# Altium PCB Placement_Douglas_RAM_NOR_dirty_test.PcbDoc
Units mm, origin at the board's own origin, x right, y up, seen from the top; angles counter-clockwise.
Board outline 70 x 43 mm, 4 copper layers (Top Layer, GND, Signal Layer 1, Bottom Layer), stack 1.534 mm thick; 103 components, 152 nets, 535 pads, 36 vias.
Unrouted connection lines stored in the file: 354.
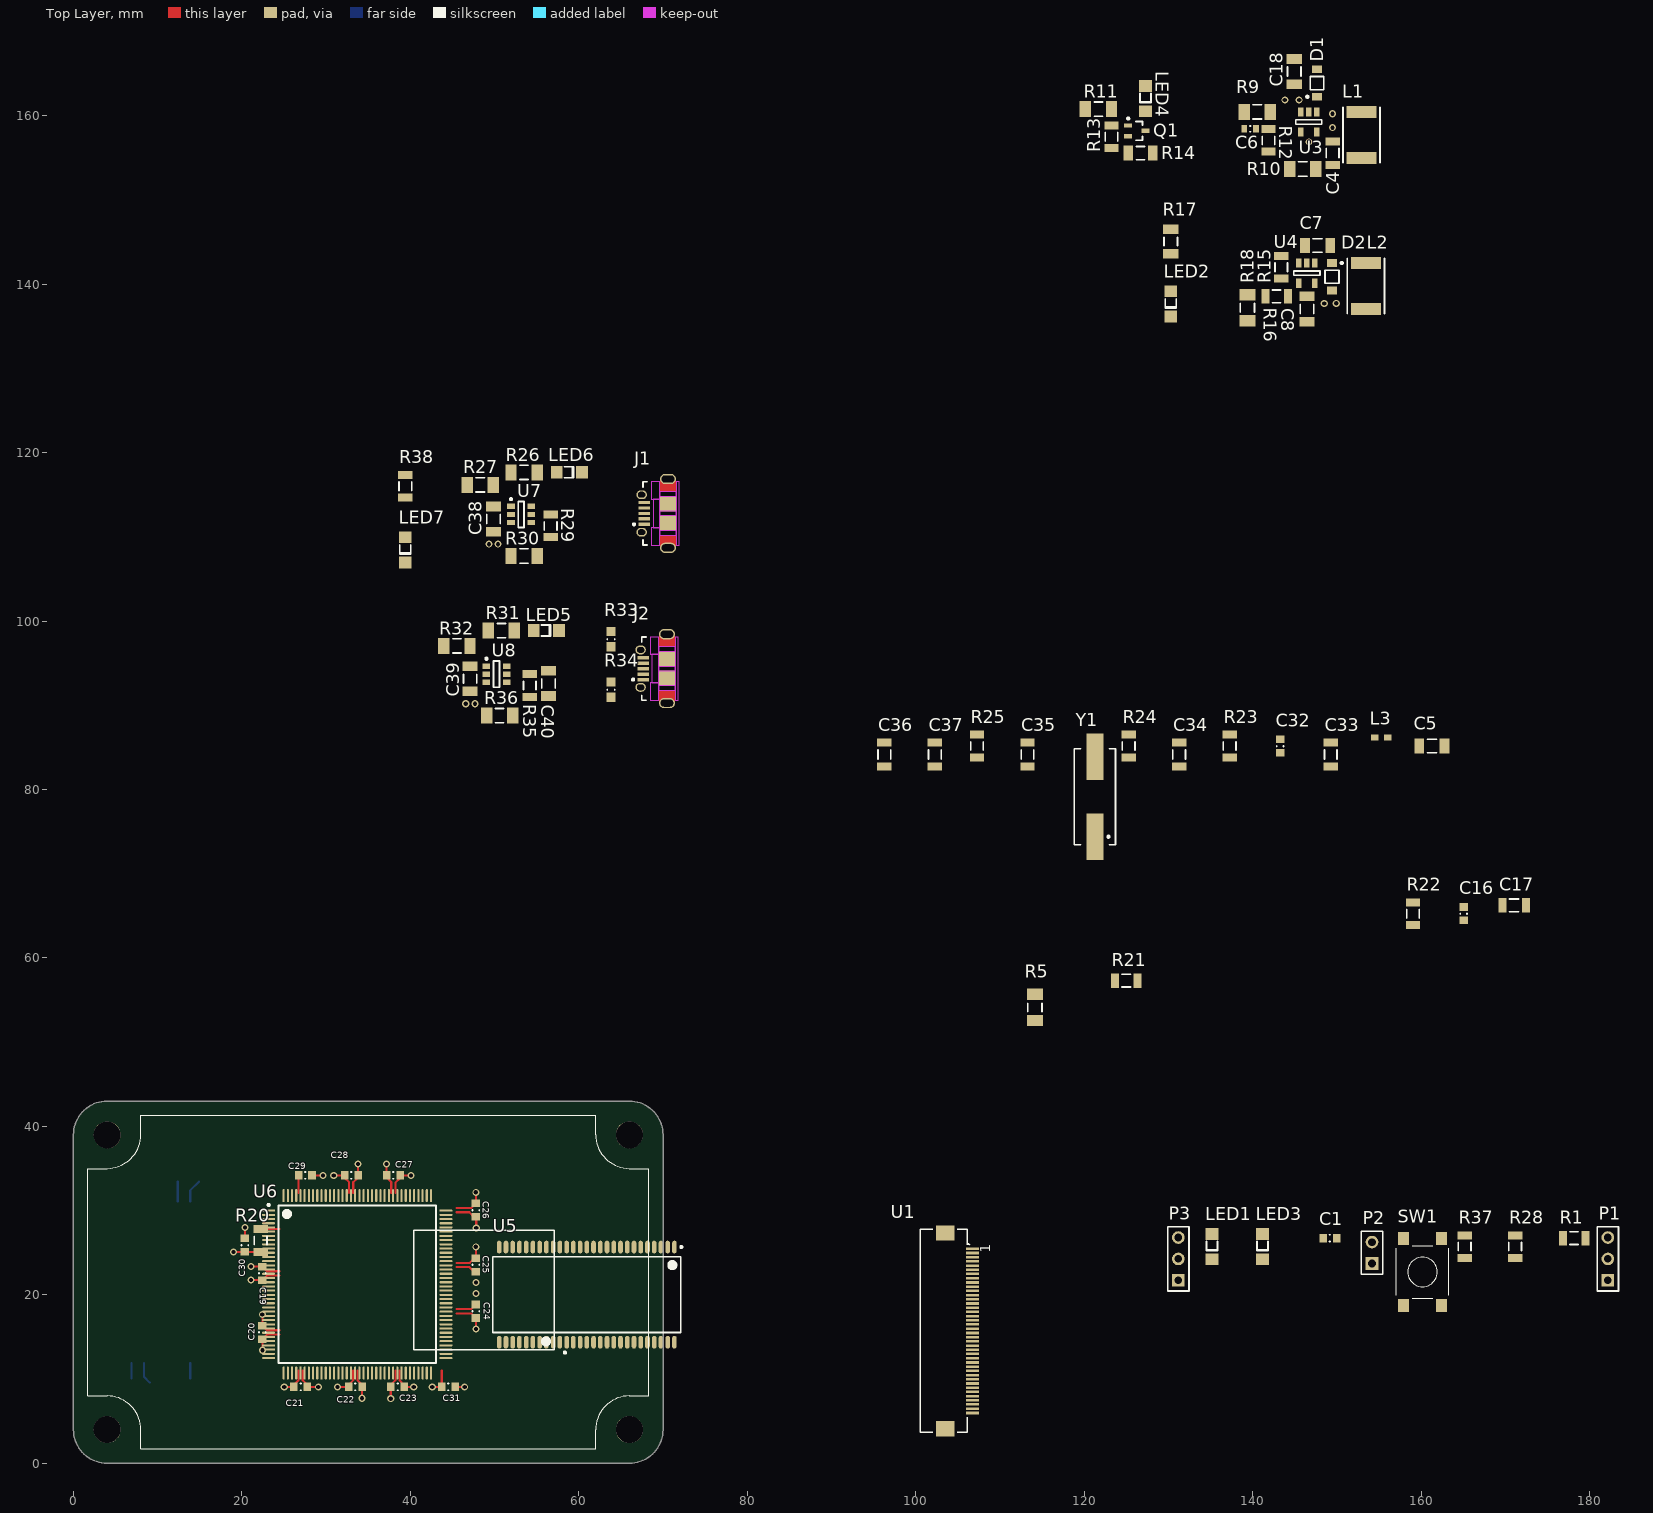
[diagram p0: Top Layer view]
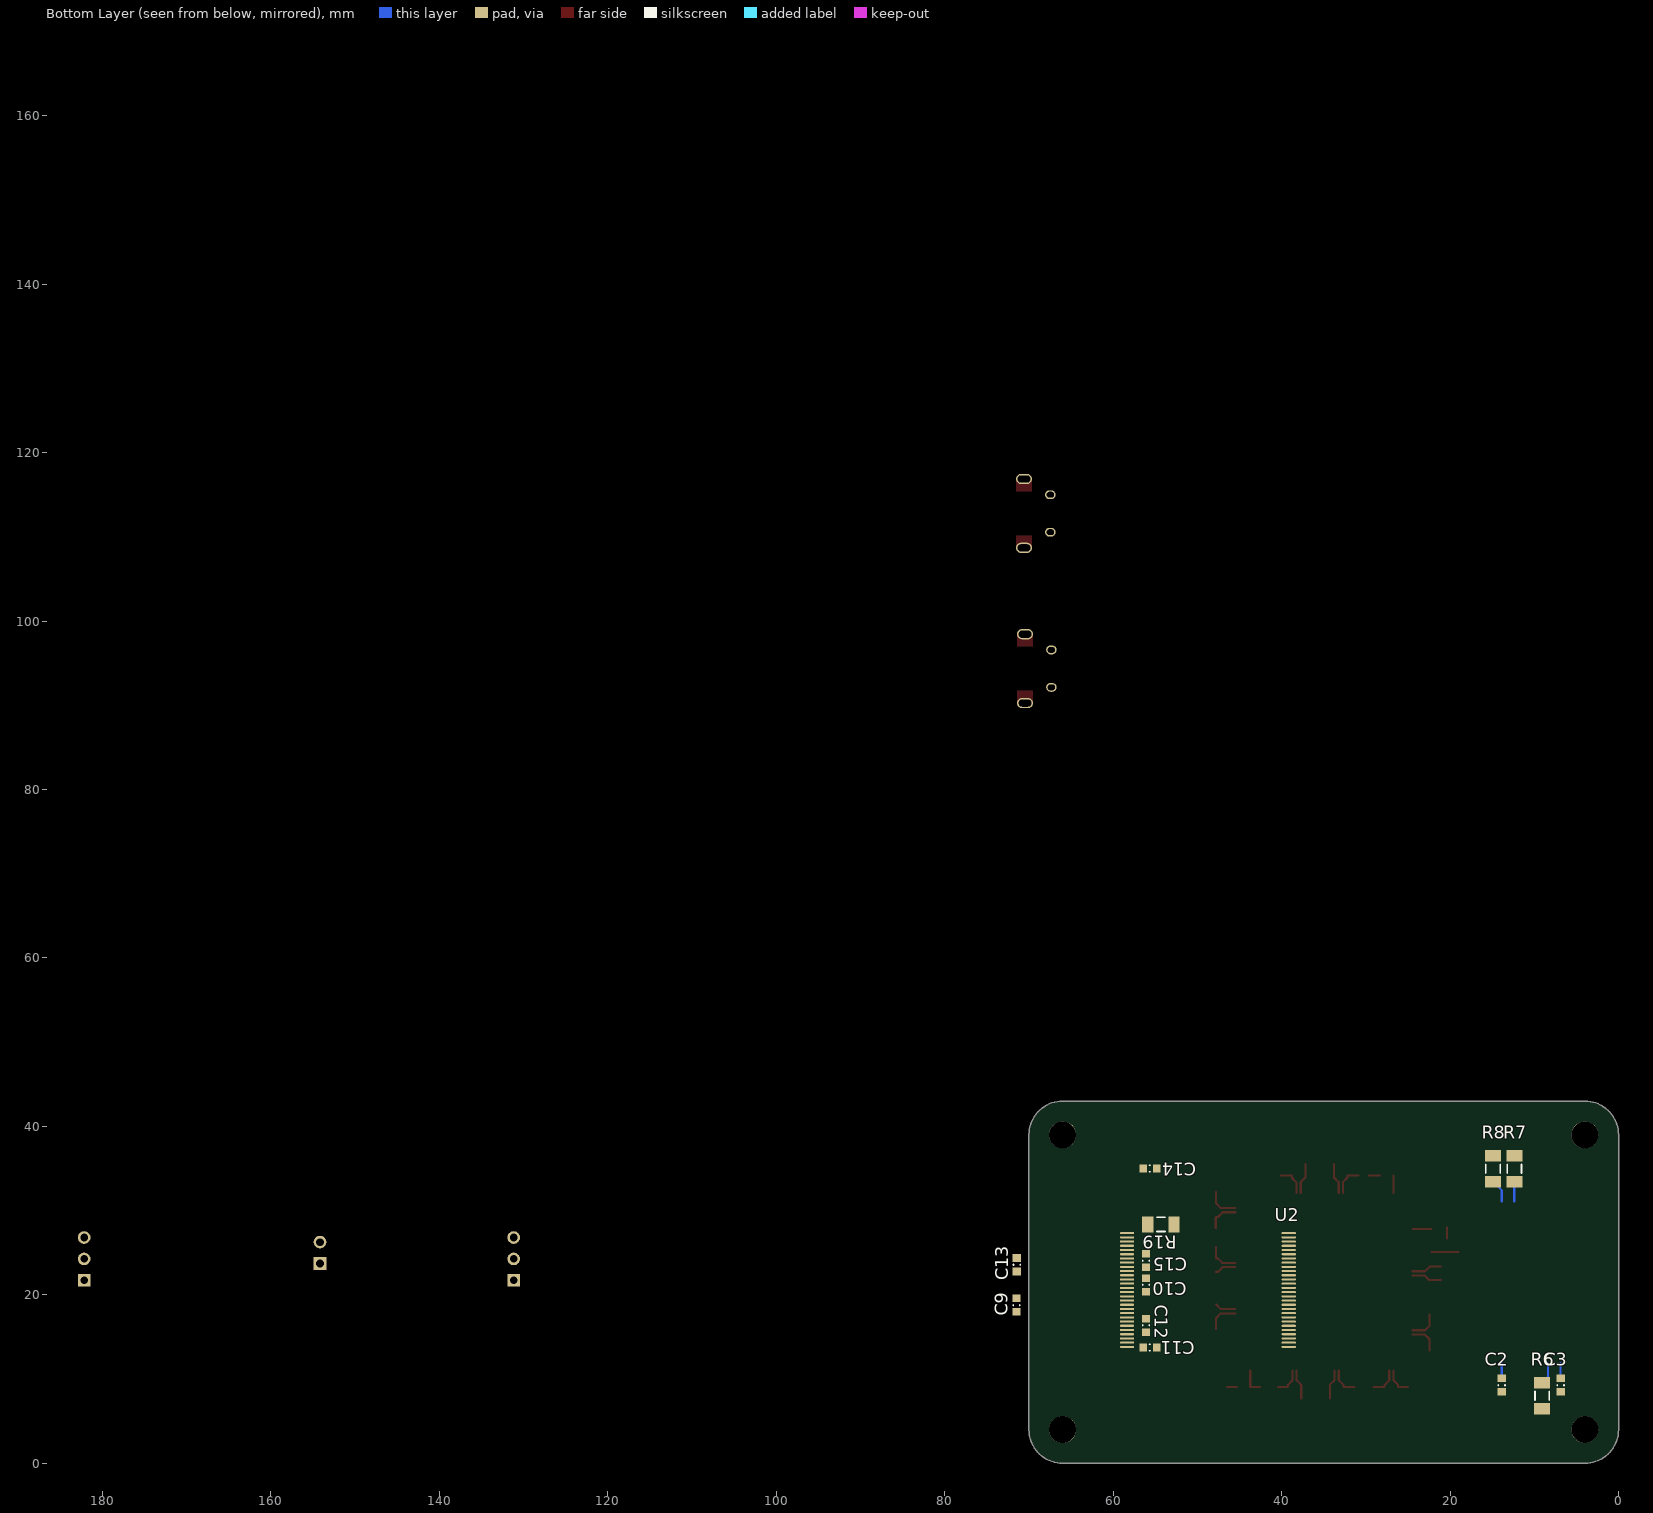
[diagram p1: Bottom Layer view, seen from below]
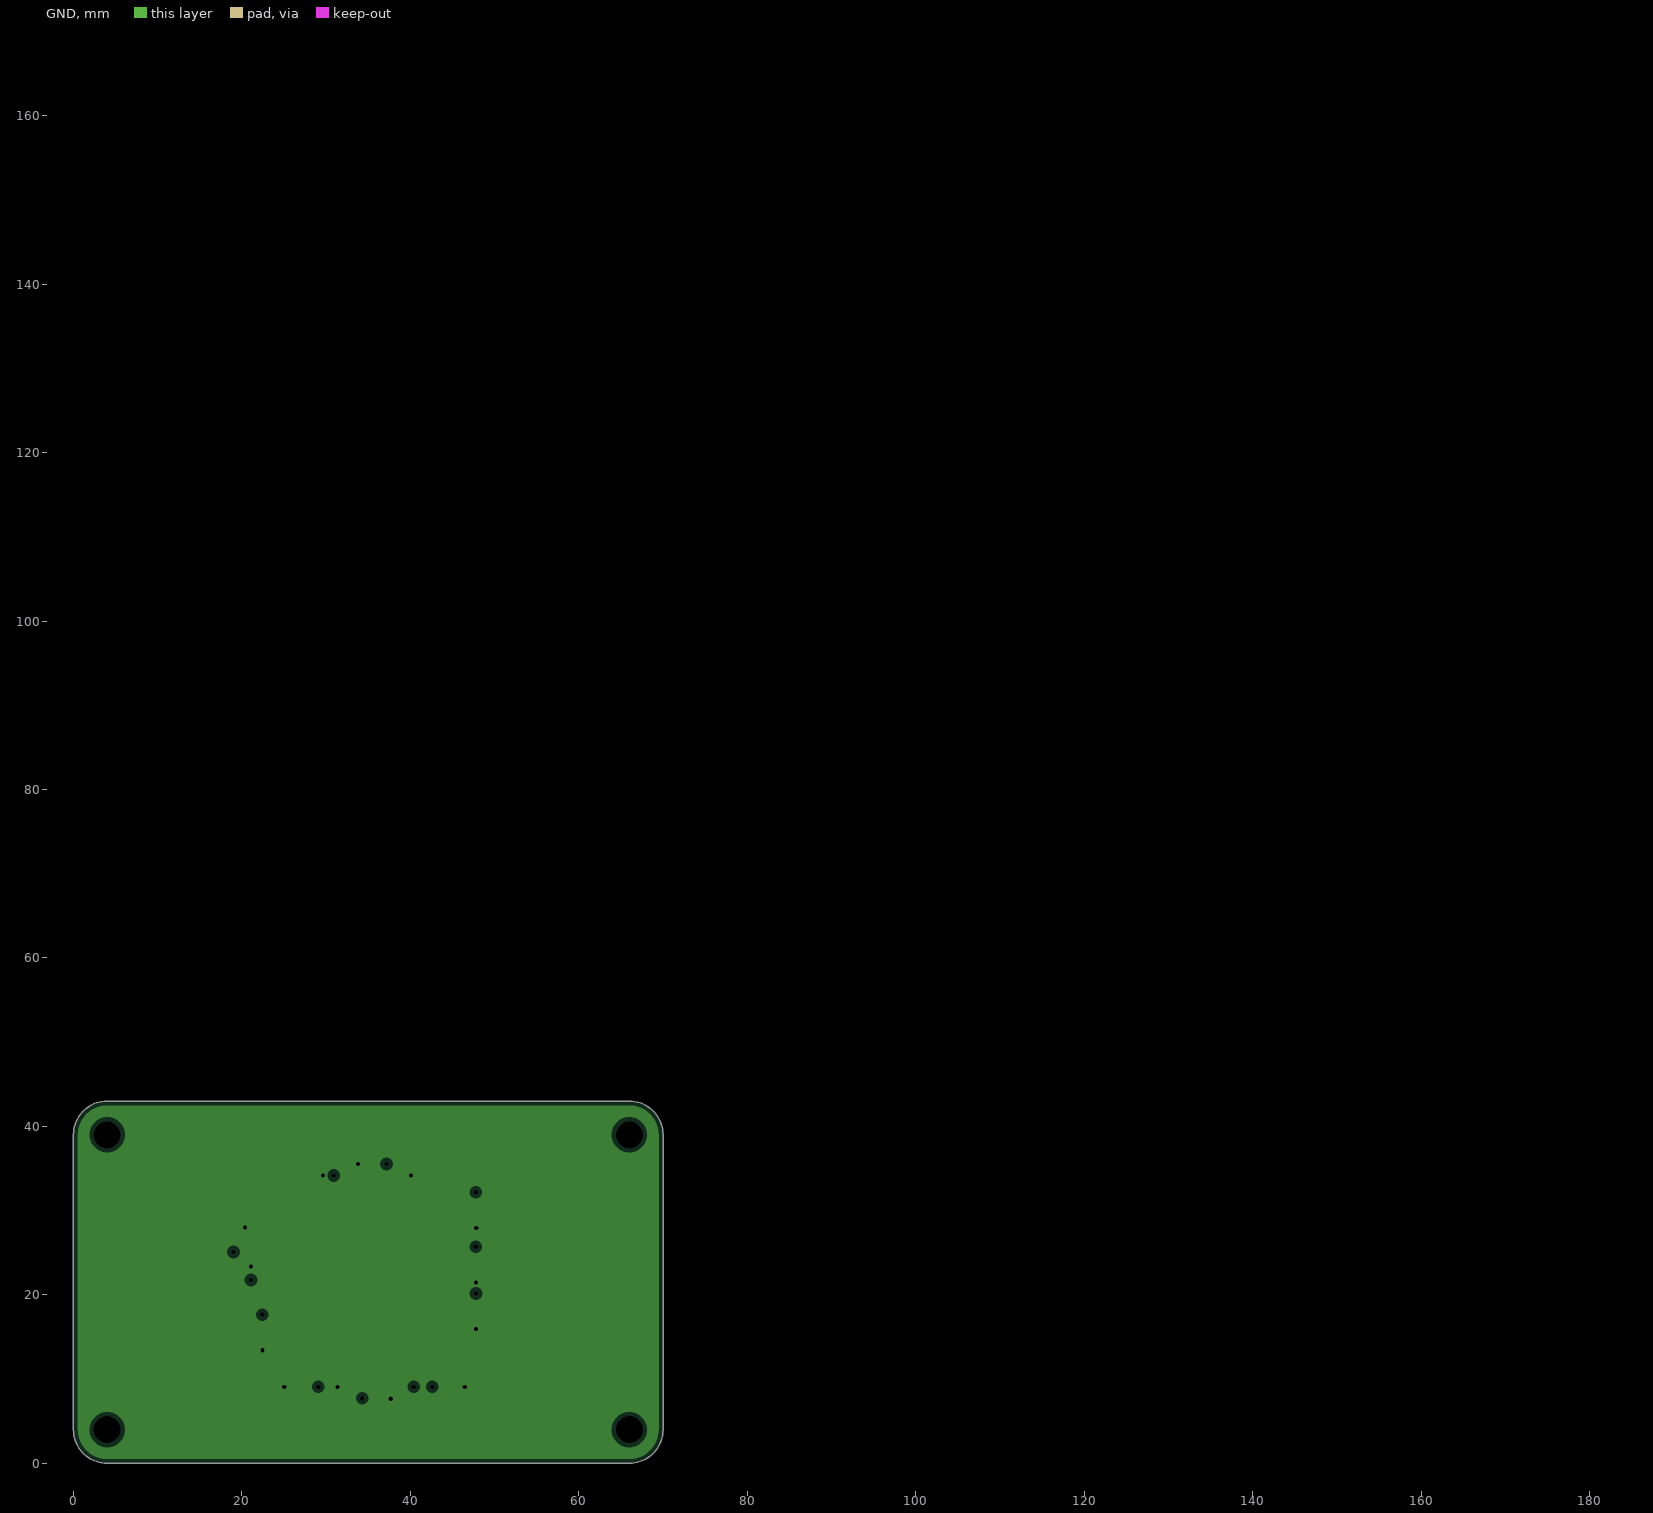
[diagram p2: GND, clearances drawn from the general rule]

## Layer stack, top to bottom
Top Solder: solder mask 0.0102, Solder Resist, Dk 3.5
Top Layer: signal copper 0.017
Dielectric1: prepreg 0.36, Dk 4.2
GND: plane copper 0.035, net GND
Dielectric 2: core 0.71, FR4, Dk 4.2
Signal Layer 1: signal copper 0.035
Dielectric 3: prepreg 0.36, Dk 4.2
Bottom Layer: signal copper 0.017
Bottom Solder: solder mask 0.0102, Solder Resist, Dk 3.5

## Board outline
4,0 cw(c4,4) 0,4 0,39 cw(c4,39) 4,43 66,43 cw(c66,39) 70,39 70,4 cw(c66,4) 66,0

## Design rules (kind name [scope] priority, off if disabled: settings)
Clearance [All] p1: gap=0.21
DiffPairsRouting [All] p1: maxlimit=0.254 minlimit=0.254 mostfreqgap=0.254 toplayer_minwidth=0.381 toplayer_maxwidth=0.381 toplayer_prefwidth=0.381 midlayer1_minwidth=0.381 midlayer1_maxwidth=0.381 midlayer1_prefwidth=0.381 bottomlayer_minwidth=0.381 bottomlayer_maxwidth=0.381 bottomlayer_prefwidth=0.381 maxuncoupledlength=12.7
MinimumSolderMaskSliver [All] p1: minsoldermaskwidth=0.21
PlaneClearance [All] p1: clearance=0.508
PlaneConnect [All] p1: planeconnectstyle=Relief reliefexpansion=0.508 reliefentries=4 reliefconductorwidth=0.254 reliefairgap=0.254
PolygonConnect [All] p1: connectstyle=Relief reliefconductorwidth=0.254 reliefentries=4 polygonreliefangle="90 Angle" airgapwidth=0.254
RoomDefinition USB [InComponentClass('USB')] p1: confinementstyle=ConfineIn formatcopy=TRUE lockcomponents=FALSE outline 35.775,83.6 75.425,83.6 75.425,122.175 35.775,122.175
RoomDefinition Power [InComponentClass('Power')] p2: confinementstyle=ConfineIn formatcopy=TRUE lockcomponents=FALSE outline 115.15,130.925 156.7,130.925 156.7,169.875 115.15,169.875
RoomDefinition IO_Peripherals [InComponentClass('IO_Peripherals')] p3: confinementstyle=ConfineIn formatcopy=TRUE lockcomponents=FALSE outline 96.175,2.725 184.175,2.725 184.175,31.725 96.175,31.725
RoutingVias [All] p1: holewidth=0.5 width=0.84 viastyle="Through Hole" minholewidth=0.4 minwidth=0.74 maxholewidth=0.5 maxwidth=0.84
SolderMaskExpansion [All] p1: expansion=0.102
Width [All] p1: maxlimit=0.254 minlimit=0.21 preferedwidth=0.254
25 further rules are at their usual default settings.

## Classes and differential pairs
net class PG[0..15]: PG6 PG8 PG9 PG13 PG14 PG15
net class PF[0..15]: PF6 PF7 PF8 PF9 PF10 PF11
net class PE[0..15]: PE0 PE1
net class PD[0..15]: PD2 PD4 PD5 PD7
net class PC[0..15]: PC0 PC1 PC2 PC3 PC4 PC5 PC6 PC8 PC9 PC10 PC11 PC12 PC13 PC14 PC15
net class PB[0..15]: PB0 PB1 PB2 PB3 PB4 PB5 PB6 PB7 PB12 PB13 PB14 PB15
net class PA[0..15]: PA0 PA1 PA2 PA4 PA5 PA7 PA8 PA9 PA10 PA11 PA12 PA13 PA14 PA15
net class G[7..2]: G2 G3 G4 G5 G6 G7
net class DQ[0..15]: DQ0 DQ1 DQ2 DQ3 DQ4 DQ5 DQ6 DQ7 DQ8 DQ9 DQ10 DQ11 DQ12 DQ13 DQ14 DQ15
net class B[7..2]: B2 B3 B4 B5 B6 B7
net class A[0..23]: A0 A1 A2 A3 A4 A5 A6 A7 A8 A9 A10 A11 A12 A13 A14 A15 A16 A17 A18 A19 A20 A21 A22 A23
component class USB: C38 C39 C40 J1 J2 LED5 LED6 LED7 R26 R27 R29 R30 R31 R32 R33 R34 R35 R36 R38 U7 U8
component class RAM: C9 C10 C11 C12 C13 C14 C15 R19 U5
component class Power: C4 C6 C7 C8 C18 D1 D2 L1 L2 LED2 LED4 Q1 R9 R10 R11 R12 R13 R14 R15 R16 R17 R18 U3 U4
component class NOR: C2 C3 R6 R7 R8 U2
component class MCU: C5 C16 C17 C19 C20 C21 C22 C23 C24 C25 C26 C27 C28 C29 C30 C31 C32 C33 C34 C35 C36 C37 L3 R5 R20 R21 R22 R23 R24 R25 U6 Y1
component class IO_Peripherals: C1 LED1 LED3 P1 P2 P3 R1 R28 R37 SW1 U1
differential pair OTG: +OTG_P -OTG_N

## Components (designator, comment, footprint, x,y, rotation, side; value= is the part's Value field where it differs from the comment)
C1 "100nF" CAPC0603(1608)100_N 149.175,26.725 r0 top
C2 "100nF" CAPC0603(1608)100_N 13.875,9.275 r90 bottom
C3 "100nF" CAPC0603(1608)100_N 6.875,9.275 r90 bottom
C4 "2.2uF 16V" CAPC1206(3216)190_L 149.5,155.55 r270 top
C5 "4.7uF" CAPC1206(3216)190_N 161.275,85.15 r0 top
C6 "CAP 100pF 50V 0603(1608)" CAPC0603(1608)100_L 139.7,158.425 r180 top
C7 "CAP 22uF 16V 1206(3216)" CAPC1206(3216)190_N 147.725,144.6 r0 top
C8 "CAP 22uF 16V 1206(3216)" CAPC1206(3216)190_N 146.45,137.05 r270 top
C9 "100nF" CAPC0603(1608)100_N 71.475,18.775 r270 bottom
C10 "100nF" CAPC0603(1608)100_N 56.1,21.175 r270 bottom
C11 "100nF" CAPC0603(1608)100_N 55.65,13.75 r0 bottom
C12 "100nF" CAPC0603(1608)100_N 56.1,16.375 r270 bottom
C13 "100nF" CAPC0603(1608)100_N 71.425,23.575 r270 bottom
C14 "100nF" CAPC0603(1608)100_N 55.65,35 r0 bottom
C15 "100nF" CAPC0603(1608)100_N 56.1,24.075 r90 bottom
C16 "100nF" CAPC0603(1608)100_N 165.05,65.25 r90 top
C17 "1uF" CAPC1206(3216)170_L 171.05,66.25 r0 top
C18 "4.7uF" CAPC1206(3216)190_N 144.95,165.225 r90 top
C19 "100nF" CAPC0603(1608)100_N 22.425,22.55 r270 top
C20 "100nF" CAPC0603(1608)100_N 22.425,15.55 r90 top
C21 "100nF" CAPC0603(1608)100_N 26.975,9.075 r0 top
C22 "100nF" CAPC0603(1608)100_N 33.475,9.075 r0 top
C23 "100nF" CAPC0603(1608)100_N 38.475,9.075 r0 top
C24 "100nF" CAPC0603(1608)100_N 47.775,18.05 r90 top
C25 "100nF" CAPC0603(1608)100_N 47.775,23.55 r90 top
C26 "100nF" CAPC0603(1608)100_N 47.775,30.05 r90 top
C27 "100nF" CAPC0603(1608)100_N 37.975,34.175 r180 top
C28 "100nF" CAPC0603(1608)100_N 33,34.175 r180 top
C29 "100nF" CAPC0603(1608)100_N 27.525,34.175 r180 top
C30 "100nF" CAPC0603(1608)100_N 20.35,25.9 r270 top
C31 "100nF" CAPC0603(1608)100_N 44.525,9.075 r180 top
C32 "100nF" CAPC0603(1608)100_N 143.275,85.15 r90 top
C33 "1uF" CAPC1206(3216)170_L 149.275,84.15 r90 top
C34 "CAP 18pF 630V" CAPC1206(3216)170_L 131.275,84.15 r90 top
C35 "CAP 18pF 630V" CAPC1206(3216)170_L 113.275,84.15 r90 top
C36 "2.2uF 16V" CAPC1206(3216)190_L 96.275,84.15 r90 top
C37 "2.2uF 16V" CAPC1206(3216)190_L 102.275,84.15 r90 top
C38 "4.7uF" CAPC1206(3216)190_N 49.875,112.1 r90 top
C39 "4.7uF" CAPC1206(3216)190_N 47.1,93.15 r90 top
C40 "4.7uF" CAPC1206(3216)190_N 56.4,92.6 r90 top
D1 "MBR0530T1G" ONSC-SOD-123-2-425-04_V 147.65,163.875 r90 top
D2 "MBR230LSFT1G" ONSC-SOD-123FL-2-498-01_V 149.425,140.875 r270 top
J1 "ZX62D-AB-5P8" HIRO-ZX62D-AB-5P8_V 69.025,112.775 r90 top
J2 "ZX62D-AB-5P8" HIRO-ZX62D-AB-5P8_V 68.9,94.35 r90 top
L1 "22.0 µH" WE-PD4-S 152.925,157.7 r90 top
L2 "2.20 µH" WE-PD4-S 153.45,139.775 r270 top
L3 "Ferrite" SMD-0603 155.275,86.15 r0 top
LED1 "150120YS75000" 1206_A 135.175,25.725 r90 top
LED2 "150120GS75000" 1206_A 130.275,137.65 r90 top
LED3 "150120RS75000" 1206_A 141.175,25.725 r90 top
LED4 "150120BS75000" 1206_A 127.275,162.025 r90 top
LED5 "150120RS75000" 1206_A 56.15,98.875 r180 top
LED6 "150120RS75000" 1206_A 58.875,117.675 r180 top
LED7 "150120YS75000" 1206_A 39.4,108.45 r90 top
P1 "Header 3" HDR1X3 182.175,21.725 r90 top
P2 "Header 2" HDR1X2 154.175,23.725 r90 top
P3 "Header 3" HDR1X3 131.175,21.725 r90 top
Q1 "BC847BW" INF-SOT323_N 126.25,158.2 r0 top
R1 "100K 1% 1206(3216)" RESC1206(3216)_L 178.175,26.725 r0 top
R5 "10K 5% 1206" RESC1206(3216)_M 114.15,54.125 r90 top
R6 "10K 5% 1206" RESC1206(3216)_M 9.075,8.025 r270 bottom
R7 "10K 5% 1206" RESC1206(3216)_M 12.375,34.975 r90 bottom
R8 "10K 5% 1206" RESC1206(3216)_M 14.9,34.975 r90 bottom
R9 "215K 1% 1206(3216)" RESC1206(3216)_M 140.55,160.45 r180 top
R10 "10K 5% 1206" RESC1206(3216)_M 145.95,153.675 r0 top
R11 "10K 5% 1206" RESC1206(3216)_M 121.7,160.775 r180 top
R12 "13K3 1% 1206(3216)" RESC1206(3216)_L 141.875,157.075 r90 top
R13 "3K32 1%" RESC1206(3216)_L 123.25,157.5 r90 top
R14 "86R6 1%" RESC1206(3216)_N 126.675,155.55 r180 top
R15 "45K3 1% 1206(3216)" RESC1206(3216)_L 143.4,142 r270 top
R16 "100K 1% 1206(3216)" RESC1206(3216)_L 142.85,138.55 r0 top
R17 "5R1 1% 1206(3216)" RESC1206(3216)_N 130.275,145.05 r90 top
R18 "10K 5% 1206" RESC1206(3216)_M 139.375,137.2 r270 top
R19 "10K 5% 1206" RESC1206(3216)_M 54.325,28.375 r180 bottom
R20 "Jumper 1206(3216)" RESC1206(3216)_L 22.225,26.45 r90 top
R21 "Jumper 1206(3216)" RESC1206(3216)_L 125,57.3 r0 top
R22 "Jumper 1206(3216)" RESC1206(3216)_L 159.05,65.25 r90 top
R23 "Jumper 1206(3216)" RESC1206(3216)_L 137.275,85.15 r90 top
R24 "402R 1% 1206(3216)" RESC1206(3216)_L 125.275,85.15 r90 top
R25 "Jumper 1206(3216)" RESC1206(3216)_L 107.275,85.15 r90 top
R26 "330R 5% 1206(3216)" RESC1206(3216)_M 53.5,117.65 r180 top
R27 "10K 5% 1206" RESC1206(3216)_M 48.3,116.175 r180 top
R28 "130R 5% 1206(3216)" RESC1206(3216)_L 171.175,25.725 r90 top
R29 "18K7 1%" RESC1206(3216)_L 56.65,111.3 r90 top
R30 "10K 5% 1206" RESC1206(3216)_M 53.5,107.725 r180 top
R31 "330R 5% 1206(3216)" RESC1206(3216)_M 50.8,98.85 r180 top
R32 "10K 5% 1206" RESC1206(3216)_M 45.525,97.05 r180 top
R33 "22R 1%" RESC0603(1608)_M 63.825,97.85 r90 top
R34 "22R 1%" RESC0603(1608)_M 63.825,91.85 r90 top
R35 "18K7 1%" RESC1206(3216)_L 54.175,92.35 r90 top
R36 "10K 5% 1206" RESC1206(3216)_M 50.6,88.775 r180 top
R37 "130R 5% 1206(3216)" RESC1206(3216)_L 165.175,25.725 r90 top
R38 "130R 5% 1206(3216)" RESC1206(3216)_L 39.4,116 r90 top
SW1 "430182043816" 430182043816 160.175,22.725 r90 top
U1 "SOCKET FFC/FPC, ZIF, 0.5MM, 40WAY" HIROSE_FH12S-40S-0.5SH(55) 110.175,15.725 r90 top
U2 "S29GL256P" 56-Pin_Standard_TSOP 48.75,20.575 r0 bottom
U3 "LM27313XMF/NOPB" DBV0005A 146.675,159.25 r270 top
U4 "LMR10510XMFE/NOPB" DBV0005A 146.45,141.3 r270 top
U5 "MT48LC32M8A2P-7E" MICT-P-54_N 60.95,20.025 r270 top
U6 "STM32F429ZIT6" STM-LQFP144_L 33.7,21.25 r0 top
U7 "TPS2552DBVT" DBV6_L 53.15,112.65 r0 top
U8 "TPS2552DBVT" DBV6_L 50.225,93.7 r0 top
Y1 "HC49/4H_SMX" HC49/4H_SMX 121.275,79.15 r90 top

## Footprints (in the part's own frame and the unit in brackets; to place one, negate y for a bottom-side part, rotate by r counter-clockwise, add the part's x,y. Pads: shape width x height; smd on the part's side, far side on the other; paste and mask are expansions set on the pad)
56-Pin_Standard_TSOP [mm] "SOP, 56-Leads, Body 18.6x14.2mm, Pitch 0.5mm, IPC Medium Density"
  oval 1.7x0.25 smd: 1(9.6,6.75) 2(9.6,6.25) 3(9.6,5.75) 4(9.6,5.25) 5(9.6,4.75) 6(9.6,4.25) 7(9.6,3.75) 8(9.6,3.25) 9(9.6,2.75) 10(9.6,2.25) 11(9.6,1.75) 12(9.6,1.25) 13(9.6,0.75) 14(9.6,0.25) 15(9.6,-0.25) 16(9.6,-0.75) 17(9.6,-1.25) 18(9.6,-1.75) 19(9.6,-2.25) 20(9.6,-2.75) 21(9.6,-3.25) 22(9.6,-3.75) 23(9.6,-4.25) 24(9.6,-4.75) 25(9.6,-5.25) 26(9.6,-5.75) 27(9.6,-6.25) 28(9.6,-6.75) 29(-9.6,-6.75) 30(-9.6,-6.25) 31(-9.6,-5.75) 32(-9.6,-5.25) 33(-9.6,-4.75) 34(-9.6,-4.25) 35(-9.6,-3.75) 36(-9.6,-3.25) 37(-9.6,-2.75) 38(-9.6,-2.25) 39(-9.6,-1.75) 40(-9.6,-1.25) 41(-9.6,-0.75) 42(-9.6,-0.25) 43(-9.6,0.25) 44(-9.6,0.75) 45(-9.6,1.25) 46(-9.6,1.75) 47(-9.6,2.25) 48(-9.6,2.75) 49(-9.6,3.25) 50(-9.6,3.75) 51(-9.6,4.25) 52(-9.6,4.75) 53(-9.6,5.25) 54(-9.6,5.75) 55(-9.6,6.25) 56(-9.6,6.75)
  body extent -9.3,-7.1 9.3,7.1, height 1.2
1206_A [mm] "Chip LED, 2-Leads, Body 3.2x1.6mm, IPC Medium Density"
  rect 1.4x1.5 smd: 1(-1.5,0) 2(1.5,0)
  silkscreen extent -0.5,-0.67 0.6,0.65, body extent -1.6,-0.8 1.6,0.8, height 0.68
430182043816 [mm] "6*6mm vertical type, SMD, height 4.3mm, black actuator, 160gf, T&R"
  rect 1.55x1.3 smd: 1(-3.975,2.25) 2(-3.975,-2.25) 3(3.975,2.25) 4(3.975,-2.25)
  silkscreen extent -3.1,-3.1 3.1,3.1, body extent -4.5,-3.1 4.5,3.1, height 4.29
CAPC0603(1608)100_L [mm] "Chip Capacitor, Body 1.6x0.8mm, Height 1.0mm, IPC High Density"
  rect 0.7x0.9 smd: 1(-0.7,0) 2(0.7,0)
  silkscreen extent -0.05,-0.35 0.05,0.35, body extent -0.87,-0.47 0.88,0.48, height 1
CAPC0603(1608)100_N [mm] "Chip Capacitor, Body 1.6x0.8mm, Height 1.0mm, IPC Medium Density"
  rect 0.9x1 smd: 1(-0.8,0) 2(0.8,0)
  silkscreen extent -0.05,-0.4 0.05,0.4, body extent -0.87,-0.48 0.88,0.47, height 1
CAPC1206(3216)170_L [mm] "Chip Capacitor, Body 3.2x1.6mm, Height 1.7mm, IPC High Density"
  rect 0.95x1.7 smd: 1(-1.4,0) 2(1.4,0)
  silkscreen extent -0.55,-0.75 0.55,0.75, body extent -1.7,-0.9 1.7,0.9, height 1.7
CAPC1206(3216)190_L [mm] "Chip Capacitor, Body 3.2x1.6mm, Height 1.9mm, IPC High Density"
  rect 0.95x1.7 smd: 1(-1.4,0) 2(1.4,0)
  silkscreen extent -0.55,-0.75 0.55,0.75, body extent -1.7,-0.9 1.7,0.9, height 1.9
CAPC1206(3216)190_N [mm] "Chip Capacitor, Body 3.2x1.6mm, Height 1.9mm, IPC Medium Density"
  rect 1.15x1.8 smd: 1(-1.5,0) 2(1.5,0)
  silkscreen extent -0.55,-0.8 0.55,0.8, body extent -1.7,-0.9 1.7,0.9, height 1.9
DBV0005A [mm]
  rect 1.1x0.65 smd paste-0.102 mask+0.051: 1(-1.2,0.95) 2(-1.2,0) 3(-1.2,-0.95) 4(1.2,-0.95) 5(1.2,0.95)
  silkscreen extent -0.25,-1.55 0.25,1.55
DBV6_L [mm] "SOT23, 6-Leads, Body 2.9x1.6mm, Pitch 0.95mm, Lead Span 2.8mm, IPC High Density"
  rect 0.9x0.65 smd: 1(-1.2,0.95) 2(-1.2,0) 3(-1.2,-0.95) 4(1.2,-0.95) 5(1.2,0) 6(1.2,0.95)
  silkscreen extent -1.32,-1.55 0.35,1.95, body extent -0.87,-1.52 0.87,1.53, height 1.45
HC49/4H_SMX [mm] "Surface Mount Quartz Crystal; Body 13.4 (inc. leads) x 4.9 mm (LxW max)"
  rect 5.5x2 smd: 1(-4.75,0) 2(4.75,0)
  silkscreen extent -5.7,-2.45 5.7,2.45
HDR1X2 [mm] "Connector; Header; 2 Position"
  rect 1.5x1.5 hole 0.9: 1(0,0)
  round 1.5 hole 0.9: 2(2.54,0)
  silkscreen extent -1.27,-1.27 3.81,1.27
HDR1X3 [mm] "Connector; Header; 3 Position"
  rect 1.5x1.5 hole 0.9: 1(0,0)
  round 1.5 hole 0.9: 2(2.54,0) 3(5.08,0)
  silkscreen extent -1.27,-1.27 6.35,1.27
HIRO-ZX62D-AB-5P8_V [mm] "USB Micro-AB Connector, 5-Leads, Pitch 0.65mm"
  rect 0.4x1.35 smd: 1(-1.3,1.238) 2(-0.65,1.238) 3(0,1.238) 4(0.65,1.238) 5(1.3,1.238)
  oval 1.05x1.25 hole 0.65 slot 0.85 at 90 deg: 6(2.225,1.563) 11(-2.225,1.563)
  oval 1.225x1.9 hole 0.825 slot 1.5 at 90 deg: 7(4.088,-1.562) 10(-4.088,-1.562)
  rect 1.8x1.9 smd: 8(1.15,-1.562) 9(-1.15,-1.562)
  Top Layer region: -4.088,-2.513 -2.6,-2.513 -2.6,-0.613 -4.088,-0.613
  Top Layer region: 2.6,-2.512 4.088,-2.512 4.088,-0.612 2.6,-0.612
  Top Layer keep-out region: 2.59,-0.602 2.06,-0.602 2.06,-2.522 2.59,-2.522
  Top Layer keep-out region: -0.24,-2.522 0.24,-2.522 0.24,-0.602 -0.24,-0.602
  Top Layer keep-out region: -2.59,-2.522 -2.06,-2.522 -2.06,-0.602 -2.59,-0.602
  Top Layer keep-out region: -3.75,-2.887 3.75,-2.887 3.75,-2.522 -3.75,-2.522
  Top Layer keep-out region: 1.7,-0.603 3.75,-0.603 3.75,0.413 1.7,0.413
  Top Layer keep-out region: -1.7,-0.602 1.7,-0.602 1.7,0.213 -1.7,0.213
  Top Layer keep-out region: -3.75,-0.602 -1.7,-0.602 -1.7,0.413 -3.75,0.413
  silkscreen extent -3.75,0.91 3.75,2.59, body extent -4.37,-4.19 4.37,1.86, height 2.83
HIROSE_FH12S-40S-0.5SH(55) [mil]
  rect 12x59 smd: 1(384,135) 2(364,135) 3(344,135) 4(325,135) 5(305,135) 6(285,135) 7(266,135) 8(246,135) 9(226,135) 10(207,135) 11(187,135) 12(167,135) 13(148,135) 14(128,135) 15(108,135) 16(89,135) 17(69,135) 18(49,135) 19(30,135) 20(10,135) 21(-10,135) 22(-30,135) 23(-49,135) 24(-69,135) 25(-89,135) 26(-108,135) 27(-128,135) 28(-148,135) 29(-167,135) 30(-187,135) 31(-207,135) 32(-226,135) 33(-246,135) 34(-266,135) 35(-285,135) 36(-305,135) 37(-325,135) 38(-344,135) 39(-364,135) 40(-384,135)
  rect 71x87 smd: 41(-458,263) 42(458,263)
  silkscreen extent -474,148 474,380
INF-SOT323_N [mm] "SOT23, 3-Leads, Body 2x1.25 mm, Pitch 0.65 mm, IPC Medium Density"
  rect 0.95x0.5 smd: 1(-1.025,0.65) 2(-1.025,-0.65) 3(1.025,0)
  silkscreen extent -1.15,-1.1 0.67,1.57, body extent -0.67,-1.1 0.67,1.1, height 1
MICT-P-54_N [mm] "SOP, 54-Leads, Body 22.22x10.16mm, Pitch 0.8mm, IPC Medium Density"
  oval 1.5x0.55 smd: 1(-5.65,10.4) 2(-5.65,9.6) 3(-5.65,8.8) 4(-5.65,8) 5(-5.65,7.2) 6(-5.65,6.4) 7(-5.65,5.6) 8(-5.65,4.8) 9(-5.65,4) 10(-5.65,3.2) 11(-5.65,2.4) 12(-5.65,1.6) 13(-5.65,0.8) 14(-5.65,0) 15(-5.65,-0.8) 16(-5.65,-1.6) 17(-5.65,-2.4) 18(-5.65,-3.2) 19(-5.65,-4) 20(-5.65,-4.8) 21(-5.65,-5.6) 22(-5.65,-6.4) 23(-5.65,-7.2) 24(-5.65,-8) 25(-5.65,-8.8) 26(-5.65,-9.6) 27(-5.65,-10.4) 28(5.65,-10.4) 29(5.65,-9.6) 30(5.65,-8.8) 31(5.65,-8) 32(5.65,-7.2) 33(5.65,-6.4) 34(5.65,-5.6) 35(5.65,-4.8) 36(5.65,-4) 37(5.65,-3.2) 38(5.65,-2.4) 39(5.65,-1.6) 40(5.65,-0.8) 41(5.65,0) 42(5.65,0.8) 43(5.65,1.6) 44(5.65,2.4) 45(5.65,3.2) 46(5.65,4) 47(5.65,4.8) 48(5.65,5.6) 49(5.65,6.4) 50(5.65,7.2) 51(5.65,8) 52(5.65,8.8) 53(5.65,9.6) 54(5.65,10.4)
  silkscreen extent -5.77,-11.15 4.5,11.35, body extent -5.1,-11.15 5.1,11.15, height 0.05
ONSC-SOD-123-2-425-04_V [mm] "SOD, 2-Leads, Body 2.69x1.6mm"
  rect 0.91x1.22 smd: 1(-1.635,0) 2(1.635,0)
  silkscreen extent -1.76,-0.8 0.78,1.28, body extent -1.35,-0.8 1.35,0.8, height 1.35
ONSC-SOD-123FL-2-498-01_V [mm] "SOD, 2-Leads, Body 2.7x1.65mm"
  rect 0.91x1.22 smd: 1(-1.635,0) 2(1.635,0)
  silkscreen extent -1.76,-0.82 0.78,1.29, body extent -1.35,-0.82 1.35,0.82, height 1
RESC0603(1608)_M [mm] "Chip Resistor, Body 1.6x0.8mm, IPC Low Density"
  rect 1.1x1.1 smd: 1(-0.9,0) 2(0.9,0)
  silkscreen extent -0.05,-0.45 0.05,0.45, body extent -0.85,-0.47 0.85,0.47, height 0.6
RESC1206(3216)_L [mm] "Chip Resistor, Body 3.2x1.6mm, IPC High Density"
  rect 0.95x1.7 smd: 1(-1.35,0) 2(1.35,0)
  silkscreen extent -0.5,-0.75 0.5,0.75, body extent -1.67,-0.87 1.67,0.87, height 0.75
RESC1206(3216)_M [mm] "Chip Resistor, Body 3.2x1.6mm, IPC Low Density"
  rect 1.35x1.9 smd: 1(-1.55,0) 2(1.55,0)
  silkscreen extent -0.5,-0.85 0.5,0.85, body extent -1.67,-0.87 1.67,0.87, height 0.75
RESC1206(3216)_N [mm] "Chip Resistor, Body 3.2x1.6mm, IPC Medium Density"
  rect 1.15x1.8 smd: 1(-1.45,0) 2(1.45,0)
  silkscreen extent -0.5,-0.8 0.5,0.8, body extent -1.67,-0.87 1.67,0.87, height 0.75
SMD-0603 [mm] "Chip Inductor, 2-Leads, Body 1.6x0.8mm"
  rect 0.85x0.7 smd: 1(-0.775,0) 2(0.775,0)
  body extent -0.8,-0.4 0.8,0.4, height 0.79
STM-LQFP144_L [mm] "Thin QFP, 144-Leads, Body 20x20mm, Pitch 0.5mm, IPC High Density"
  oval 1.55x0.25 smd: 1(-10.525,8.75) 2(-10.525,8.25) 3(-10.525,7.75) 4(-10.525,7.25) 5(-10.525,6.75) 6(-10.525,6.25) 7(-10.525,5.75) 8(-10.525,5.25) 9(-10.525,4.75) 10(-10.525,4.25) 11(-10.525,3.75) 12(-10.525,3.25) 13(-10.525,2.75) 14(-10.525,2.25) 15(-10.525,1.75) 16(-10.525,1.25) 17(-10.525,0.75) 18(-10.525,0.25) 19(-10.525,-0.25) 20(-10.525,-0.75) 21(-10.525,-1.25) 22(-10.525,-1.75) 23(-10.525,-2.25) 24(-10.525,-2.75) 25(-10.525,-3.25) 26(-10.525,-3.75) 27(-10.525,-4.25) 28(-10.525,-4.75) 29(-10.525,-5.25) 30(-10.525,-5.75) 31(-10.525,-6.25) 32(-10.525,-6.75) 33(-10.525,-7.25) 34(-10.525,-7.75) 35(-10.525,-8.25) 36(-10.525,-8.75) 73(10.525,-8.75) 74(10.525,-8.25) 75(10.525,-7.75) 76(10.525,-7.25) 77(10.525,-6.75) 78(10.525,-6.25) 79(10.525,-5.75) 80(10.525,-5.25) 81(10.525,-4.75) 82(10.525,-4.25) 83(10.525,-3.75) 84(10.525,-3.25) 85(10.525,-2.75) 86(10.525,-2.25) 87(10.525,-1.75) 88(10.525,-1.25) 89(10.525,-0.75) 90(10.525,-0.25) 91(10.525,0.25) 92(10.525,0.75) 93(10.525,1.25) 94(10.525,1.75) 95(10.525,2.25) 96(10.525,2.75) 97(10.525,3.25) 98(10.525,3.75) 99(10.525,4.25) 100(10.525,4.75) 101(10.525,5.25) 102(10.525,5.75) 103(10.525,6.25) 104(10.525,6.75) 105(10.525,7.25) 106(10.525,7.75) 107(10.525,8.25) 108(10.525,8.75)
  oval 0.25x1.55 smd: 37(-8.75,-10.525) 38(-8.25,-10.525) 39(-7.75,-10.525) 40(-7.25,-10.525) 41(-6.75,-10.525) 42(-6.25,-10.525) 43(-5.75,-10.525) 44(-5.25,-10.525) 45(-4.75,-10.525) 46(-4.25,-10.525) 47(-3.75,-10.525) 48(-3.25,-10.525) 49(-2.75,-10.525) 50(-2.25,-10.525) 51(-1.75,-10.525) 52(-1.25,-10.525) 53(-0.75,-10.525) 54(-0.25,-10.525) 55(0.25,-10.525) 56(0.75,-10.525) 57(1.25,-10.525) 58(1.75,-10.525) 59(2.25,-10.525) 60(2.75,-10.525) 61(3.25,-10.525) 62(3.75,-10.525) 63(4.25,-10.525) 64(4.75,-10.525) 65(5.25,-10.525) 66(5.75,-10.525) 67(6.25,-10.525) 68(6.75,-10.525) 69(7.25,-10.525) 70(7.75,-10.525) 71(8.25,-10.525) 72(8.75,-10.525) 109(8.75,10.525) 110(8.25,10.525) 111(7.75,10.525) 112(7.25,10.525) 113(6.75,10.525) 114(6.25,10.525) 115(5.75,10.525) 116(5.25,10.525) 117(4.75,10.525) 118(4.25,10.525) 119(3.75,10.525) 120(3.25,10.525) 121(2.75,10.525) 122(2.25,10.525) 123(1.75,10.525) 124(1.25,10.525) 125(0.75,10.525) 126(0.25,10.525) 127(-0.25,10.525) 128(-0.75,10.525) 129(-1.25,10.525) 130(-1.75,10.525) 131(-2.25,10.525) 132(-2.75,10.525) 133(-3.25,10.525) 134(-3.75,10.525) 135(-4.25,10.525) 136(-4.75,10.525) 137(-5.25,10.525) 138(-5.75,10.525) 139(-6.25,10.525) 140(-6.75,10.525) 141(-7.25,10.525) 142(-7.75,10.525) 143(-8.25,10.525) 144(-8.75,10.525)
  silkscreen extent -10.65,-9.35 9.35,9.55, body extent -10,-10 10,10, height 1.6
WE-PD4-S [mm] "SMD Inductor, 2-Leads, Body 6.6 x 4.4 mm"
  rect 1.4x3.56 smd: 1(-2.73,0) 2(2.73,0)
  silkscreen extent -3.3,-2.2 3.3,2.2, body extent -3.3,-2.22 3.3,2.22, height 2.91

## Part data
C1 C2 C3 C9 C10 C11 C12 C13 C14 C15 C16 C19 C20 C21 C22 C23 C24 C25 C26 C27 C28 C29 C30 C31 C32: library part CMP-1035-02592-1, "CAP 100nF 50V ±10% 0603 (1608 Metric) Thickness 1mm SMD"
C4 C36 C37: library part CMP-1037-04816-1, "CAP 2.2uF 16V ±20% 1206 (3216 Metric) Thickness 1.9mm SMD"
C5 C18 C38 C39 C40: library part CMP-1037-04923-1, "CAP 4.7uF 50V ±10% 1206 (3216 Metric) Thickness 1.9mm SMD"
C6: library part CMP-1035-01270-1, "CAP 100pF 50V ±10% 0603 (1608 Metric) Thickness 1mm SMD"
C7 C8: library part CMP-1037-04992-1, "CAP 22uF 16V ±10% 1206 (3216 Metric) Thickness 1.9mm SMD"
C17 C33: library part CMP-1037-04687-1, "CAP 1uF 16V ±10% 1206 (3216 Metric) Thickness 1.7mm SMD"
C34 C35: library part CMP-1037-00919-1, "CAP 18pF 500V ±5% 1206 (3216 Metric) Thickness 1.7mm SMD"
D1: library part CMP-1055-00413-1, "Schottky Power Rectifier, 2-Pin SOD-123, Pb-Free, Tape and Reel"
D2: library part CMP-1055-00442-1, "Schottky Power Rectifier, 2-Pin SOD-123, Pb-Free, Tape and Reel"
J1 J2: library part CMP-1349-00001-1, "USB 2.0 Standard Micro-USB Connector, Micro AB-Standard (Bottom Mount), 30 V AC, -30 to 85 degC, Right Angle, 5-Pin 7.5 x 5.6 x 2.8 mm SMD, RoHS, Reel"
L1: library part CMP-0227-00739-1, "SMD-Power Inductor WE-PD4, L = 22.0 µH"
L2: library part CMP-0227-00671-1, "SMD-Power Inductor WE-PD4, L = 2.20 µH"
L3: library part CMP-0220-00181-1, "SMD EMI Suppression Ferrite Bead WE-CBF, Z = 600 Ohm"
LED1 LED7: library part CMP-1426-00019-1, "SMD mono-color Chip LED, WL-SMCW, Yellow"
LED2: library part CMP-1426-00014-1, "SMD mono-color Chip LED, WL-SMCW, Green"
LED3 LED5 LED6: library part CMP-1426-00013-1, "SMD mono-color Chip LED, WL-SMCW, Red"
LED4: library part CMP-1426-00015-1, "SMD mono-color Chip LED, WL-SMCW, Blue"
P1 P3: "Header, 3-Pin"
P2: "Header, 2-Pin"
Q1: library part CMP-1177-00080-1, "NPN Silicon AF Transistor, 45 V VCEO, 100 mA IC, SOT323, Reel, Green"
R1 R16: library part CMP-1014-00736-1, "100K 0.25W 1% 1206 (3216 Metric)  SMD"
R5 R6 R7 R8 R10 R11 R18 R19 R27 R30 R32 R36: library part CMP-1014-00098-1, "10K 0.25W 5% 1206 (3216 Metric)  SMD"
R9: library part CMP-1014-00771-1, "215K 0.25W 1% 1206 (3216 Metric)  SMD"
R12: library part CMP-1014-00636-1, "13K3 0.25W 1% 1206 (3216 Metric)  SMD"
R13: library part CMP-1014-00568-1, "3K32 0.25W 1% 1206 (3216 Metric)  SMD"
R14: library part CMP-1014-00390-1, "86R6 0.25W 1% 1206 (3216 Metric)  SMD"
R15: library part CMP-1014-00697-1, "45K3 0.25W 1% 1206 (3216 Metric)  SMD"
R17: library part CMP-1014-00251-1, "5R1 0.25W 1% 1206 (3216 Metric)  SMD"
R20 R21 R22 R23 R25: library part CMP-1014-00001-1, "Jumper 1206 (3216 Metric)"
R24: library part CMP-1014-00465-1, "402R 0.25W 1% 1206 (3216 Metric)  SMD"
R26 R31: library part CMP-1014-00062-1, "330R 0.25W 5% 1206 (3216 Metric)  SMD"
R28 R37 R38: library part CMP-1014-00053-1, "130R 0.25W 5% 1206 (3216 Metric)  SMD"
R29 R35: library part CMP-1014-00652-1, "18K7 0.25W 1% 1206 (3216 Metric)  SMD"
R33 R34: library part CMP-1012-00320-1, "22R 0.1W 1% 0603 (1608 Metric)  SMD"
SW1: library part CMP-1452-00013-1, "WS-TASV SMD Tact Switch 6X6 mm"
U1: library part FH12S-40S-0.5SH(55)
U3 U4: "Imported"
U5: library part CMP-0351-00096-1, "256Mb PC133 SDR SDRAM, 32Mb x 8, 7.5ns, 3.3V, 0 to 70 degC, 54-Pin TSOP, Pb-Free"
U6: library part CMP-0243-00051-2, "ARM Cortex-M4 32-bit MCU+FPU, 225 DMIPS, 2048 kB Flash, 256 kB Internal RAM, 114 I/Os, 144-pin LQFP, -40 to 85 degC, Tray"
U7 U8: library part CMP-0337-00290-1, "Adjustable, Active Low, Constant-Current, Current-Limited Power-Distribution Switch, 0.075 to 1.7 A Current Limit, -40 to 85 degC, 6-pin SOT-23 (DBV), Green (RoHS & no Sb/Br)"
Y1: "Surface Mount Quartz Crystal"

## Free pads (board coordinates)
  round 3.2 hole 3.2 unplated: 0(4,4) 1(4,39) 2(66,39) 3(66,4)

## Via types
v1: diameter 0.84, hole 0.5, Top Layer to GND, 24 vias
v2: diameter 0.84, hole 0.5, Top Layer to Signal Layer 1, 12 vias

## Nets (pads, with @x,y where several pads share a name; then routed paths per layer and width w, separated by ;. In a path a pad name is that pad's centre, name@x,y a point inside that pad or via, vN(x,y) a via of type N, cw(c..) or ccw(c..) an arc to the next point about the centre after c; other vN are vias at no path point)
3V3: C2.2 C3.2 C5.2 C7.2 C9.2 C10.2 C11.2 C12.2 C13.2 C14.2 C15.2 C19.2 C20.2 C21.2 C22.2 C23.2 C24.2 C25.2 C26.2 C27.2 C28.2 C29.2 C30.2 C31.2 L2.2 L3.1 R1.2 R6.2 R7.2 R8.2 R15.1 R17.2 R19.2 R20.1 R23.1 U1.4 U2.29 U2.43 U5.1 U5.3 U5.9 U5.14 U5.27 U5.43 U5.49 U6.17 U6.30 U6.39 U6.52 U6.62 U6.72 U6.84 U6.95 U6.108 U6.121 U6.131 U6.143 U6.144 | length 46.8
  Top Layer w0.254: v2(19,25.1) C30.2 R20.1 ; v2(21.075,21.75) C19.2 22.45,21.75 23,22.3 24.45,22.3 ; v2(22.425,17.65) C20.2 22.975,15.8 24.45,15.8 ; 26.725,32.075 C29.2 ; 27.225,11.025 27.225,9.85 27.775,9.3 C21.2 v2(29.075,9.075) ; v2(30.9,34.175) C28.2@32.175,34.175 ; C28.2 C28.2@32.175,34.175 ; 32.725,32.075 32.725,33.375 32.175,33.925 C28.2@32.175,34.175 ; 33.725,11.025 33.725,9.875 34.275,9.325 C22.2 v2(34.275,7.725) ; v2(37.175,35.525) C27.2 37.175,33.95 37.725,33.4 37.725,32.075 ; 38.725,11.025 38.725,9.825 C23.2@39.275,9.275 ; C23.2 v2(40.4,9.075) ; v2(42.6,9.075) C31.2 43.725,11.025 ; 45.5,18.3 47.225,18.3 C24.2 ; 45.5,23.8 47.05,23.8 47.6,24.35 C25.2 v2(47.775,25.7) ; 45.5,30.3 47.225,30.3 C26.2 v2(47.775,32.175)
  Bottom Layer w0.254: C3.2 6.875,11.9 ; C2.2 13.875,11.9
  other v2: 47.8,20.15
5V: C4.2 C8.2 C39.2 L1.1 LED4.2 P2.1 R10.2 R18.2 R31.2 R32.2 R38.2 U3.5 U4.5 U7.6 U8.1
5V_NOT-MONITORED: C38.2 J1.1 R26.2 R27.2 U7.1
A0: U2.31 U5.23 U6.10
A1: U2.26 U5.24 U6.11
A2: U2.25 U5.25 U6.12
A3: U2.24 U5.26 U6.13
A4: U2.23 U5.29 U6.14
A5: U2.22 U5.30 U6.15
A6: U2.21 U5.31 U6.50
A7: U2.20 U5.32 U6.53
A8: U2.10 U5.33 U6.54
A9: U2.9 U5.34 U6.55
A10: U2.8 U5.22 U6.56
A11: U2.7 U5.35 U6.57
A12: U2.6 U5.36 U6.87
A13: U2.5 U6.88
A14: U2.4 U5.20 U6.89
A15: U2.3 U5.21 U6.90
A16: U2.54 U6.80
A17: U2.19 U6.81
A18: U2.18 U6.82
A19: U2.11 U6.2
A20: U2.12 U6.3
A21: U2.15 U6.4
A22: U2.2 U6.5
A23: U2.1 U6.1
B2: U1.23 U6.122
B3: U1.24 U6.126
B4: U1.25 U6.127
B5: U1.26 U6.37
B6: U1.27 U6.139
B7: U1.28 U6.140
DQ0: U2.35 U5.2 U6.85
DQ1: U2.37 U5.5 U6.86
DQ2: U2.39 U5.8 U6.114
DQ3: U2.41 U5.11 U6.115
DQ4: U2.44 U5.44 U6.58
DQ5: U2.46 U5.47 U6.59
DQ6: U2.48 U5.50 U6.60
DQ7: U2.50 U5.53 U6.63
DQ8: U2.36 U6.64
DQ9: U2.38 U6.65
DQ10: U2.40 U6.66
DQ11: U2.42 U6.67
DQ12: U2.45 U6.68
DQ13: U2.47 U6.77
DQ14: U2.49 U6.78
DQ15: U2.51 U6.79
G2: U1.15 U6.42
G3: U1.16 U6.125
G4: U1.17 U6.69
G5: U1.18 U6.70
G6: U1.19 U6.97
G7: U1.20 U6.117
GND: C1.1 C2.1 C3.1 C4.1 C5.1 C7.1 C8.1 C9.1 C10.1 C11.1 C12.1 C13.1 C14.1 C15.1 C16.1 C17.1 C18.1 C19.1 C20.1 C21.1 C22.1 C23.1 C24.1 C25.1 C26.1 C27.1 C28.1 C29.1 C30.1 C31.1 C32.1 C33.1 C34.2 C35.2 C36.1 C37.1 C38.1 C39.1 C40.1 D2.2 J1.5 J1.6 J1.7 J1.8 J1.9 J1.10 J1.11 J2.5 J2.6 J2.7 J2.8 J2.9 J2.10 J2.11 LED1.1 LED2.1 LED3.1 LED7.1 P1.3 P2.2 P3.3 R5.1 R12.1 R13.1 R14.1 R16.1 R29.1 R30.1 R35.1 R36.1 SW1.2 SW1.4 U1.1 U1.3 U1.5 U1.6 U1.13 U1.14 U1.21 U1.22 U1.29 U1.36 U2.33 U2.52 U3.2 U4.2 U5.6 U5.12 U5.28 U5.41 U5.46 U5.52 U5.54 U6.16 U6.31 U6.38 U6.51 U6.61 U6.83 U6.94 U6.107 U6.120 U6.130 U7.2 U8.2 | length 38.7
  Top Layer w0.254: C30.1 20.35,27.975 v1(20.375,28) ; v1(21.075,23.35) C19.1 22.975,22.8 24.45,22.8 ; v1(22.45,13.425) 22.45,14.75 23,15.3 24.45,15.3 ; v1(25.025,9.075) C21.1 26.175,9.3 26.725,9.85 26.725,11.025 ; C29.1 v1(29.625,34.175) ; v1(31.35,9.075) C22.1 32.675,9.325 33.225,9.875 33.225,11.025 ; 33.225,32.075 33.225,33.375 33.775,33.925 C28.1@33.775,34.175 ; C28.1@33.8,34.2 v1(33.8,35.525) ; v1(37.675,7.675) C23.1 37.675,9.3 38.225,9.85 38.225,11.025 ; 38.225,32.075 38.225,33.325 38.775,33.875 C27.1 v1(40.075,34.175) ; C31.1 v1(46.45,9.075) ; 45.5,17.8 47.225,17.8 C24.1 47.8,17.225 v1(47.8,15.95) ; 45.5,23.3 46.975,23.3 47.525,22.75 C25.1 ; 45.5,29.8 47,29.8 47.55,29.25 C26.1 47.825,29.2 v1(47.825,27.95)
  other v1: 47.8,21.45 46.575,90.175 47.675,90.175 49.325,109.125 50.4,109.125 148.5,137.7 149.925,137.725 146.7,156.9 149.475,158.575 149.475,160.225 145.525,161.85 143.825,161.875
LED+: C6.2 C18.2 D1.1 R9.2 R11.2 U1.2
NetC6_1: C6.1 R9.1 R12.2 U3.3
NetC16_2: C16.2 C17.2 R21.1 U6.32
NetC34_1: C34.1 R24.2 Y1.1
NetC35_1: C35.1 R25.2 Y1.2
NetC36_2: C36.2 U6.106
NetC37_2: C37.2 U6.71
NetD1_2: D1.2 L1.2 U3.1
NetD2_1: D2.1 L2.1 U4.1
NetJ2_2: J2.2 R33.2
NetJ2_3: J2.3 R34.2
NetLED1_2: LED1.2 R37.1
NetLED2_2: LED2.2 R17.1
NetLED3_2: LED3.2 R28.1
NetLED4_1: LED4.1 Q1.3
NetLED5_2: LED5.2 R31.1
NetLED6_2: LED6.2 R26.1
NetLED7_2: LED7.2 R38.1
NetQ1_1: Q1.1 R11.1 R13.2
NetQ1_2: Q1.2 R14.2
NetR2_1: U2.53
NetR5_2: R5.2 U6.138
NetR15_2: R15.2 R16.2 U4.3
NetR18_1: R18.1 U4.4
NetR20_2: R20.2 U6.6 | length 2.2
  Top Layer w0.254: R20.2 24.45,27.8
NetR29_2: R29.2 U7.5
NetR35_2: R35.2 U8.5
NRST: C1.2 R1.1 SW1.1 SW1.3 U6.25
OSC_IN: R25.1 U6.23
OSC_OUT: R24.1 U6.24
OTG_N: R33.1 U6.75
OTG_P: R34.1 U6.76
PA0: U6.34
PA1: U6.35
PA2: U6.36
PA4: U1.33 U6.40
PA5: U6.41
PA7: U6.43
PA8: U1.31 U6.100
PA9: P3.2 U6.101
PA10: P3.1 U6.102
PA11: U1.9 U6.103
PA12: U1.10 U6.104
PA13: P1.1 U6.105
PA14: P1.2 U6.109
PA15: U6.110
PB0: U1.8 U6.46
PB1: U1.11 U6.47
PB2: R22.1 U6.48
PB3: U6.133
PB4: R8.1 U2.14 U6.134 | length 2.7
  Bottom Layer w0.254: 13.875,31.1 13.875,32.4 R8.1
PB5: U6.135
PB6: U6.136
PB7: U6.137
PB12: J2.4 U6.73
PB13: C40.2 J2.1 U6.74 U8.6
PC0: U5.16 U6.26
PC1: U6.27
PC2: R19.1 U5.19 U6.28
PC3: U5.37 U6.29
PC4: R37.2 U6.44
PC5: R28.2 U6.45
PC6: U1.32 U6.96
PC8: LED5.1 R32.1 U6.98 U8.4
PC9: R36.2 U6.99 U8.3
PC10: U1.7 U6.111
PC11: LED6.1 R27.1 U6.112 U7.4
PC12: R30.2 U6.113 U7.3
PC13: U6.7
PC14: U6.8
PC15: U6.9
PD2: R10.1 U3.4 U6.116
PD4: U2.34 U6.118
PD5: U2.13 U6.119
PD7: R6.1 U2.32 U6.123 | length 2.6
  Bottom Layer w0.254: 8.375,11.9 8.375,10.275 R6.1
PE0: U5.39 U6.141
PE1: U6.142
PF6: U6.18
PF7: U6.19
PF8: U6.20
PF9: U6.21
PF10: U1.34 U6.22
PF11: U5.18 U6.49
PG6: U1.12 U6.91
PG7: U1.30 U6.92
PG8: U5.38 U6.93
PG9: U6.124
PG13: U6.128
PG14: U6.129
PG15: U5.17 U6.132
RY/BY#: R7.1 R22.2 U2.17 | length 2.3
  Bottom Layer w0.254: 12.375,31.1 R7.1
VDDA: C32.2 C33.2 L3.2 R21.2 R23.2 U6.33
XL: U1.39
XR: U1.37
YD: U1.38
YU: U1.40
pads on no net: J1.2 J1.3 J1.4 U1.35 U1.41 U1.42 U2.16 U2.27 U2.28 U2.30 U2.55 U2.56 U5.4 U5.7 U5.10 U5.13 U5.15 U5.40 U5.42 U5.45 U5.48 U5.51

## Polygon pours and split planes (outlines as drawn)
GND on GND (split plane): 4,42.49 66,42.49 66.016,42.491 66.249,42.483 66.497,42.456 66.742,42.412 66.984,42.35 67.22,42.272 67.45,42.176 67.673,42.065 67.888,41.937 68.092,41.795 68.287,41.639 68.469,41.469 68.639,41.287 68.795,41.092 68.937,40.888 69.065,40.673 69.176,40.45 69.272,40.22 69.35,39.984 69.412,39.742 69.456,39.497 69.483,39.249 69.491,39.016 69.49,39 69.49,4 69.491,3.984 69.483,3.751 69.456,3.503 69.412,3.258 69.35,3.016 69.272,2.78 69.176,2.55 69.065,2.327 68.937,2.112 68.795,1.908 68.639,1.713 68.469,1.531 68.287,1.361 68.092,1.205 67.888,1.063 67.673,0.935 67.45,0.824 67.22,0.728 66.984,0.65 66.742,0.588 66.497,0.544 66.249,0.517 66.016,0.509 66,0.51 4,0.51 3.984,0.509 3.751,0.517 3.503,0.544 3.258,0.588 3.016,0.65 2.78,0.728 2.55,0.824 2.327,0.935 2.112,1.063 1.908,1.205 1.713,1.361 1.531,1.531 1.361,1.713 1.205,1.908 1.063,2.112 0.935,2.327 0.824,2.55 0.728,2.78 0.65,3.016 0.588,3.258 0.544,3.503 0.517,3.751 0.509,3.984 0.51,4 0.51,39 0.509,39.016 0.517,39.249 0.544,39.497 0.588,39.742 0.65,39.984 0.728,40.22 0.824,40.45 0.935,40.673 1.063,40.888 1.205,41.092 1.361,41.287 1.531,41.469 1.713,41.639 1.908,41.795 2.112,41.937 2.327,42.065 2.55,42.176 2.78,42.272 3.016,42.35 3.258,42.412 3.503,42.456 3.751,42.483 3.984,42.491

## Keep-outs
Top Overlay:
  lines w0.102: 1.7,8 1.7,35 4,35 ccw(c4,39) 8,39 8,41.3 62,41.3 62,39 ccw(c66,39) 66,35 68.3,35 68.3,8 66,8 ccw(c66,4) 62,4 62,1.7 8,1.7 8,4 ccw(c4,4) 4,8 1.7,8

## Silkscreen, mask and mechanical layers (free items; w line width, h text height)
Mechanical 1:
  the board outline again, w0.102
Mechanical 4:
  circle w0.102: c66,39 r1.6
  circle w0.102: c4,39 r1.6
  circle w0.102: c4,4 r1.6
  circle w0.102: c66,4 r1.6
  lines w0.102: 0,21.5 70,21.5 ; 35,0 35,43

## Dimensions
0,4 to 70,4 on Mechanical 3
66,43 to 66,0 on Mechanical 3

## Text inside footprints (layer, text, board x,y; h text height)
J1: Mechanical 3 "board edge" at 71.946,105.663 h0.2 r90
J2: Mechanical 3 "board edge" at 71.821,87.238 h0.2 r90
U1: Top Overlay "1" at 109.261,25.021 h1.97 r90; Mechanical 16 "1" at 109.134,24.971 h1.97 r90; Mechanical 2 ">NAME" at 100.015,11.229 h3.23 r90; Mechanical 4 ">VALUE" at 110.556,10.112 h3.23 r90